# Altium PCB mini-charger.PcbDoc
Units mm, origin at the board's own origin, x right, y up, seen from the top; angles counter-clockwise.
Board outline 152.4 x 101.6 mm, 2 copper layers (Top Layer, Bottom Layer); 91 components, 62 nets, 263 pads, 20 vias.
Unrouted connection lines stored in the file: 186.
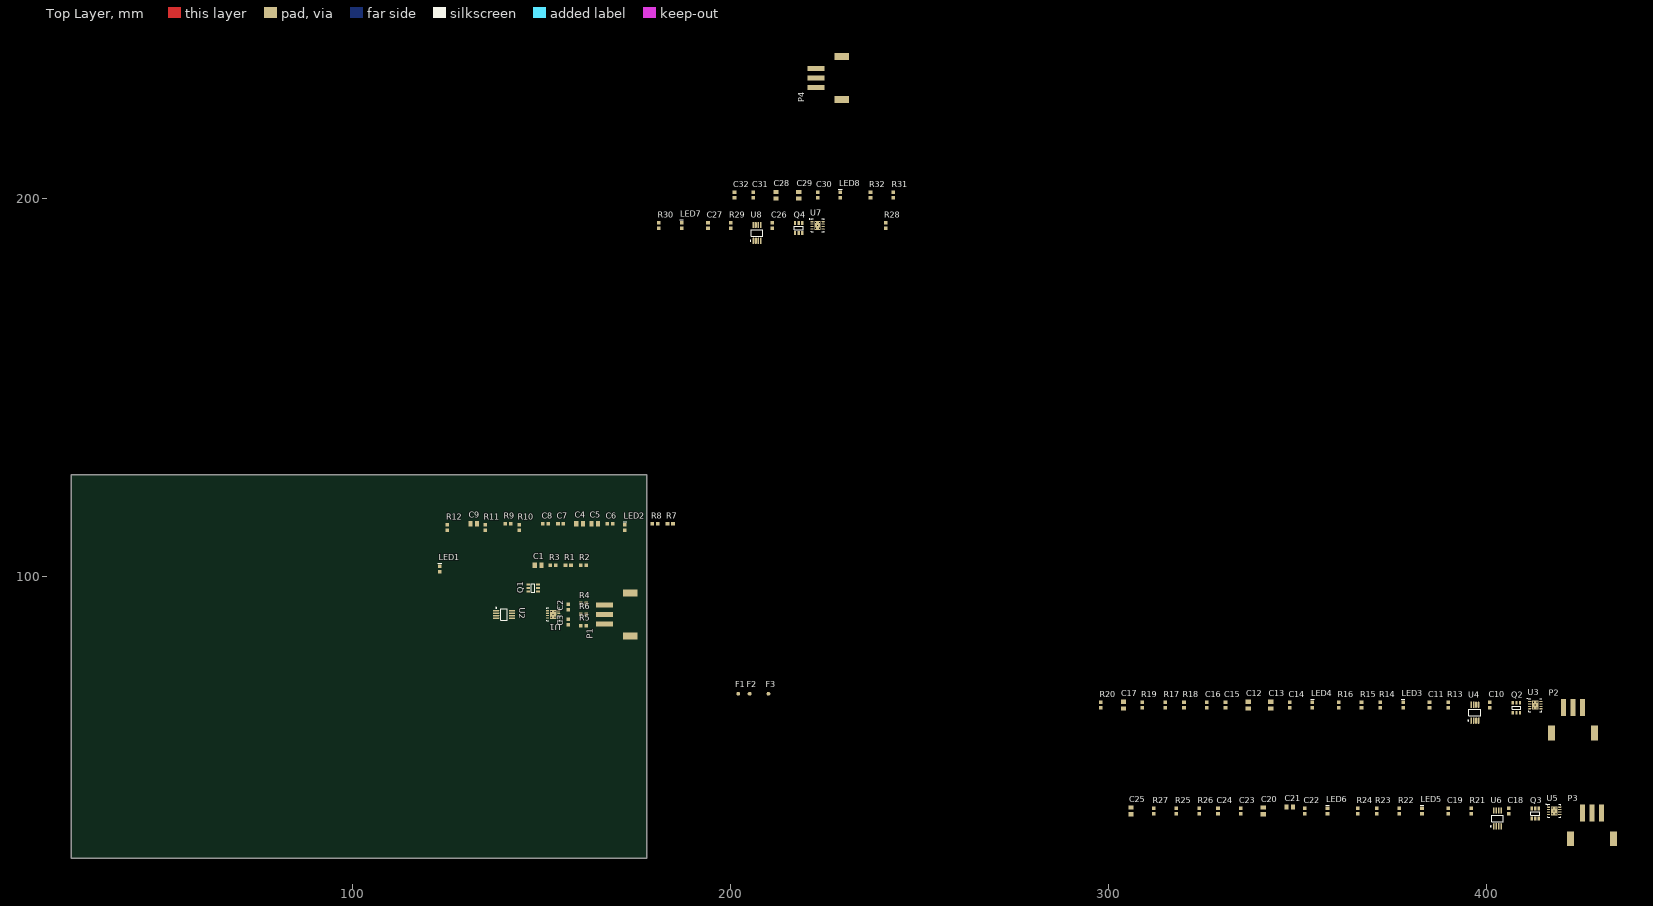
[diagram p0: Top Layer view]
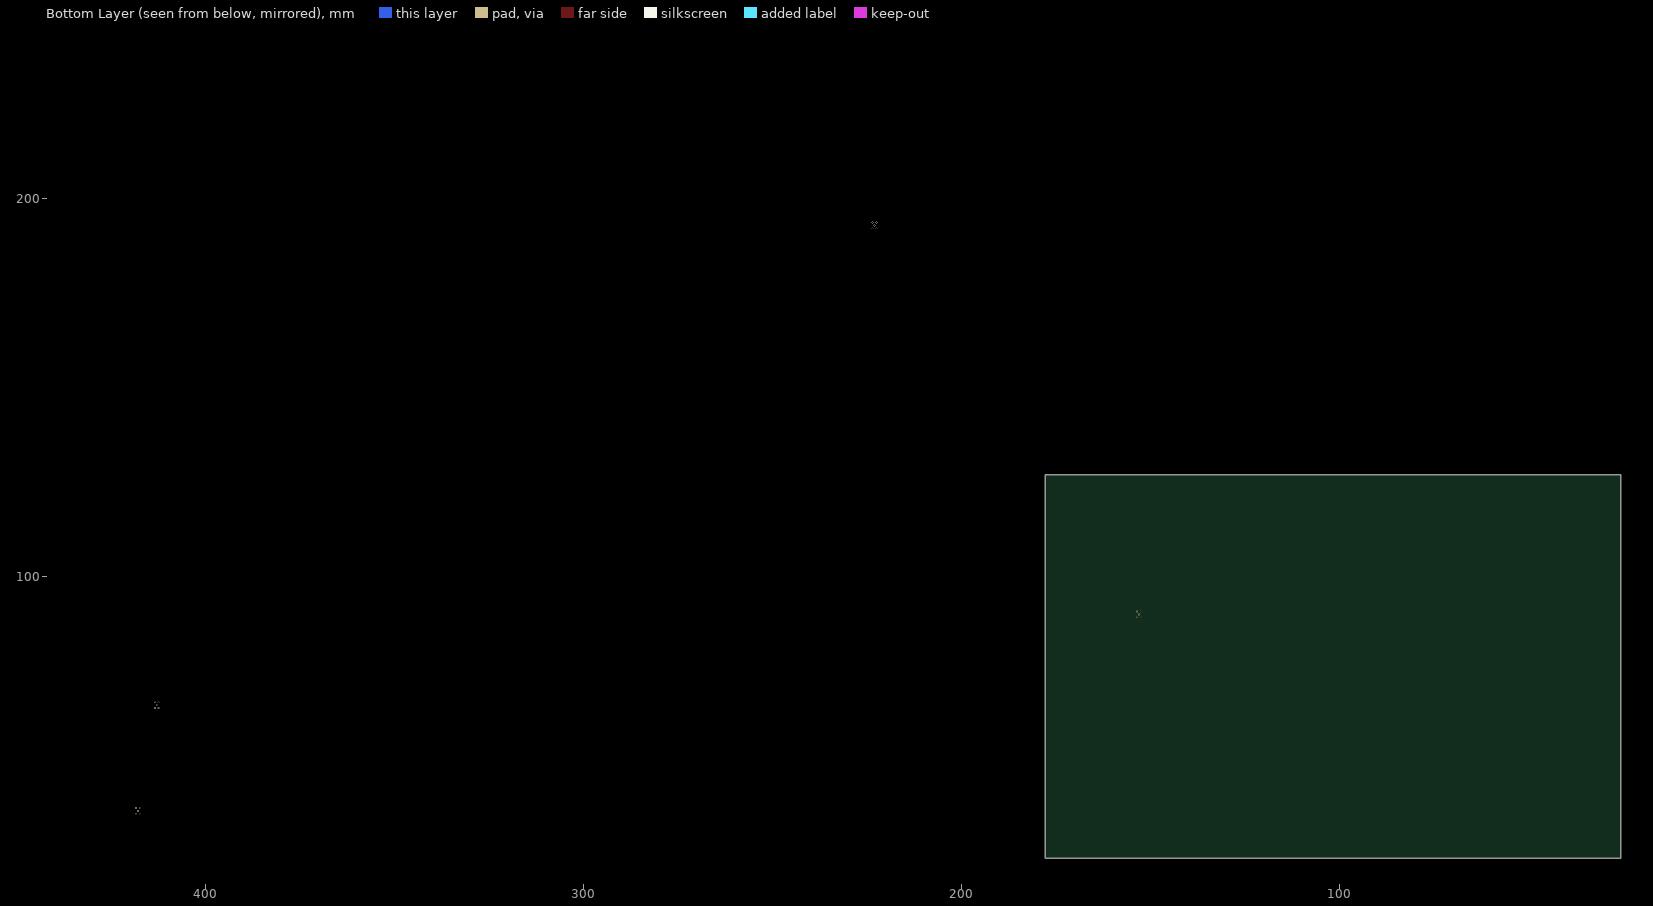
[diagram p1: Bottom Layer view, seen from below]

## Layer stack, top to bottom
Top Solder: solder mask 0.0102, Solder Resist, Dk 3.5
Top Layer: signal copper 0.0356
Dielectric 1: dielectric 0.32, FR-4, Dk 4.8
Bottom Layer: signal copper 0.0356
Bottom Solder: solder mask 0.0102, Solder Resist, Dk 3.5

## Board outline
25.4,25.4 177.8,25.4 177.8,127 25.4,127

## Design rules (kind name [scope] priority, off if disabled: settings)
Clearance [All] p1: gap=0.254
PolygonConnect [All] p1: connectstyle=Relief reliefconductorwidth=0.254 reliefentries=4 polygonreliefangle="90 Angle" airgapwidth=0.254
RoutingVias [All] p1: holewidth=0.711 width=1.27 viastyle="Through Hole" minholewidth=0.711 minwidth=1.27 maxholewidth=0.711 maxwidth=1.27
SolderMaskExpansion [All] p1: expansion=0.102
Width [All] p1: maxlimit=0.254 minlimit=0.254 preferedwidth=0.254
30 further rules are at their usual default settings.

## Components (designator, comment, footprint, x,y, rotation, side; value= is the part's Value field where it differs from the comment)
C1 "CAP" CAP0805 149,103 r0 top
C2 "CAP" CAP0603 157,92 r90 top
C3 "CAP" CAP0603 157,88 r90 top
C4 "CAP" CAP0805 160,114 r0 top
C5 "CAP" CAP0805 164,114 r0 top
C6 "CAP" CAP0603 168,114 r0 top
C7 "CAP" CAP0603 155,114 r0 top
C8 "CAP" CAP0603 151,114 r0 top
C9 "CAP" CAP0805 132,114 r0 top
C10 "CAP" CAP0603 401,66 r90 top
C11 "CAP" CAP0603 385,66 r90 top
C12 "CAP" CAP0805 337,66 r90 top
C13 "CAP" CAP0805 343,66 r90 top
C14 "CAP" CAP0603 348,66 r90 top
C15 "CAP" CAP0603 331,66 r90 top
C16 "CAP" CAP0603 326,66 r90 top
C17 "CAP" CAP0805 304,66 r90 top
C18 "CAP" CAP0603 406,38 r90 top
C19 "CAP" CAP0603 390,38 r90 top
C20 "CAP" CAP0805 341,38 r90 top
C21 "CAP" CAP0805 348,39 r0 top
C22 "CAP" CAP0603 352,38 r90 top
C23 "CAP" CAP0603 335,38 r90 top
C24 "CAP" CAP0603 329,38 r90 top
C25 "CAP" CAP0805 306,38 r90 top
C26 "CAP" CAP0603 211,193 r90 top
C27 "CAP" CAP0603 194,193 r90 top
C28 "CAP" CAP0805 212,201 r90 top
C29 "CAP" CAP0805 218,201 r90 top
C30 "CAP" CAP0603 223,201 r90 top
C31 "CAP" CAP0603 206,201 r90 top
C32 "CAP" CAP0603 201,201 r90 top
F1 "FIDUCIAL" FIDUCIAL-1MM 202,69 r0 top
F2 "FIDUCIAL" FIDUCIAL-1MM 205,69 r0 top
F3 "FIDUCIAL" FIDUCIAL-1MM 210,69 r0 top
LED1 "LED" LED0603P 123,102 r90 top
LED2 "LED" LED0603P 172,113 r90 top
LED3 "LED" LED0603P 378,66 r90 top
LED4 "LED" LED0603P 354,66 r90 top
LED5 "LED" LED0603P 383,38 r90 top
LED6 "LED" LED0603P 358,38 r90 top
LED7 "LED" LED0603P 187,193 r90 top
LED8 "LED" LED0603P 229,201 r90 top
P1 "HEADER-3POS" S3B-XH-SM4-TB 170,90 r90 top
P2 "HEADER-3POS" S3B-XH-SM4-TB 423,62 r0 top
P3 "HEADER-3POS" S3B-XH-SM4-TB 428,34 r0 top
P4 "HEADER-3POS" S3B-XH-SM4-TB 226,232 r90 top
Q1 "STT3P2UH7" SOT23-6 149,97 r90 top
Q2 "STT3P2UH7" SOT23-6 408,64 r0 top
Q3 "STT3P2UH7" SOT23-6 413,36 r0 top
Q4 "STT3P2UH7" SOT23-6 218,191 r0 top
R1 "RES" RES0603 157,103 r0 top
R2 "RES" RES0603 161,103 r0 top
R3 "RES" RES0603 153,103 r0 top
R4 "RES" RES0603 161,93 r0 top
R5 "RES" RES0603 161,87 r0 top
R6 "RES" RES0603 161,90 r0 top
R7 "RES" RES0603 184,114 r0 top
R8 "RES" RES0603 180,114 r0 top
R9 "RES" RES0603 141,114 r0 top
R10 "RES" RES0603 144,113 r90 top
R11 "RES" RES0603 135,113 r90 top
R12 "RES" RES0603 125,113 r90 top
R13 "RES" RES0603 390,66 r90 top
R14 "RES" RES0603 372,66 r90 top
R15 "RES" RES0603 367,66 r90 top
R16 "RES" RES0603 361,66 r90 top
R17 "RES" RES0603 315,66 r90 top
R18 "RES" RES0603 320,66 r90 top
R19 "RES" RES0603 309,66 r90 top
R20 "RES" RES0603 298,66 r90 top
R21 "RES" RES0603 396,38 r90 top
R22 "RES" RES0603 377,38 r90 top
R23 "RES" RES0603 371,38 r90 top
R24 "RES" RES0603 366,38 r90 top
R25 "RES" RES0603 318,38 r90 top
R26 "RES" RES0603 324,38 r90 top
R27 "RES" RES0603 312,38 r90 top
R28 "RES" RES0603 241,193 r90 top
R29 "RES" RES0603 200,193 r90 top
R30 "RES" RES0603 181,193 r90 top
R31 "RES" RES0603 243,201 r90 top
R32 "RES" RES0603 237,201 r90 top
U1 "BQ29209DRBR" DRB8-2400X1650TP 153,90 r180 top
U2 "MCP73844-840I/MS" MSOP-MS8_N 140,90 r0 top
U3 "BQ29209DRBR" DRB8-2400X1650TP 413,66 r0 top
U4 "MCP73844-840I/MS" MSOP-MS8_N 397,64 r90 top
U5 "BQ29209DRBR" DRB8-2400X1650TP 418,38 r0 top
U6 "MCP73844-840I/MS" MSOP-MS8_N 403,36 r90 top
U7 "BQ29209DRBR" DRB8-2400X1650TP 223,193 r0 top
U8 "MCP73844-840I/MS" MSOP-MS8_N 207,191 r90 top

## Footprints (in the part's own frame and the unit in brackets; to place one, negate y for a bottom-side part, rotate by r counter-clockwise, add the part's x,y. Pads: shape width x height; smd on the part's side, far side on the other; paste and mask are expansions set on the pad)
CAP0603 [mm]
  rect 0.95x0.95 smd: 1(-0.725,0) 2(0.725,0)
  body extent -0.8,-0.41 0.8,0.41, height 0.57
CAP0805 [mm]
  rect 1.1x1.4 smd: 1(0.875,0) 2(-0.875,0)
  body extent -1,-0.63 1,0.64, height 0.57
DRB8-2400X1650TP [mm] "SON, 8-Leads, Body 3x3mm, Pitch 0.65mm, Thermal Pad 2.4x1.65mm, TI Recommended"
  oval 0.85x0.3 smd paste-0.025 mask+0.07: 1(-1.475,0.975) 2(-1.475,0.325) 3(-1.475,-0.325) 4(-1.475,-0.975) 5(1.475,-0.975) 6(1.475,-0.325) 7(1.475,0.325) 8(1.475,0.975)
  rect 1.65x2.4 smd paste-0.825 mask+0.07: 9(0,0)
  silkscreen extent -2.17,-1.73 1.73,1.77, body extent -1.57,-1.57 1.58,1.58, height 1
FIDUCIAL-1MM [mm] "1MM FIDUCAL MARKER"
  round 1 smd paste+0 mask+0.5: 1(0,0)
LED0603P [mm]
  rect 0.95x0.95 smd: 1(-0.725,0) 2(0.725,0)
  silkscreen extent 1.5,-0.5 1.5,0.5, body extent -0.8,-0.4 0.81,0.4, height 0.72
MSOP-MS8_N [mm] "TSOP, 8-Leads, Body 3x3mm, Pitch 0.65mm, IPC Medium Density"
  oval 1.7x0.45 smd: 1(-2.1,0.975) 2(-2.1,0.325) 3(-2.1,-0.325) 4(-2.1,-0.975) 5(2.1,-0.975) 6(2.1,-0.325) 7(2.1,0.325) 8(2.1,0.975)
  silkscreen extent -2.22,-1.55 0.85,1.87, body extent -1.55,-1.55 1.55,1.55, height 1.1
RES0603 [mm]
  rect 0.95x0.95 smd: 1(-0.725,0) 2(0.725,0)
  body extent -0.8,-0.4 0.8,0.4, height 0.3
S3B-XH-SM4-TB [mm] "JST XH 3POS"
  rect 1.8x3.9 smd: 0(-5.7,-3.4) 0(5.7,-3.4)
  rect 1.3x4.5 smd: 1(-2.5,3.4) 2(0,3.4) 3(2.5,3.4)
  body extent -6.22,-5.25 6.23,4.75, height 6
SOT23-6 [mm] "SOT143-4 as used in SP0503BAHTG"
  round 0.2 on Top Overlay: 1(-1.5,0.75)
  rect 0.6x1 smd: 1(-0.95,0) 2(0,0) 3(0.95,0) 4(-0.95,2.6) 5(0,2.6) 6(0.95,2.6)
  silkscreen extent -1.15,0.85 1.15,1.75, body extent -1.46,0.13 1.46,2.47, height 1

## Part data
C1 C4 C5 C9 C12 C13 C17 C20 C21 C25 C28 C29: library part CAP-SM-0805-X5R-10uF, "CAP SM 0805 X5R 10uF"
C2 C3 C6 C7 C8 C10 C11 C14 C15 C16 C18 C19 C22 C23 C24 C26 C27 C30 C31 C32: library part CAP-SM-0603-X7R-100nF, "CAP SM 0603 X7R 100nF"
F1 F2 F3: library part FIDUCIAL-1MM, "FIDUCIAL 1MM CENTER"
LED1 LED2 LED3 LED4 LED5 LED6 LED7 LED8: library part LED-0603-RED, "LED 0603 RED"
P1 P2 P3 P4: library part S3B-XH-SM4-TB, "CONN HEADER XH SMD 3POS 2.5MM"
Q1 Q2 Q3 Q4: "*"
R1 R9 R17 R25: library part RES-SM-0603-1R, "RES SM 0603 1R"
R2 R10 R18 R26: library part RES-SM-0603-27R, "RES SM 0603 27R"
R3 R11 R19 R27: library part RES-SM-0603-100R, "RES SM 0603 100R"
R4 R12 R20 R28: library part RES-SM-0603-30R, "RES SM 0603 30R"
R5 R13 R21 R29: library part RES-SM-0603-130R, "RES SM 0603 130R"
R6 R14 R22 R30: library part RES-SM-0603-51R, "RES SM 0603 51R"
R7 R15 R23 R31: library part RES-SM-0603-220R, "RES SM 0603 220R"
R8 R16 R24 R32: library part RES-SM-0603-100K, "RES SM 0603 100K"
U1 U3 U5 U7: "Voltage Protection with Automatic Cell Balance for 2-Cell Li-Ion Batteries, OVP=4.3 V, -40 to 85 degC, 8-pin SON (DRB), Green (RoHS & no Sb/Br)"
U2 U4 U6 U8: "Dual Series cell Li-Ion/Li-Polymer Charge Management Controller, 8.4V, 8-Pin MSOP, Industrial Temperature"

## Via types
v1: diameter 0.5, hole 0.2, Top Layer to Bottom Layer, 20 vias

## Nets (pads, with @x,y where several pads share a name; then routed paths per layer and width w, separated by ;. In a path a pad name is that pad's centre, name@x,y a point inside that pad or via, vN(x,y) a via of type N, cw(c..) or ccw(c..) an arc to the next point about the centre after c; other vN are vias at no path point)
GND: C1.1 C3.1 C4.1 C5.1 C6.1 C7.1 C8.1 C9.1 C11.1 C12.1 C13.1 C14.1 C15.1 C16.1 C17.1 C19.1 C20.1 C21.1 C22.1 C23.1 C24.1 C25.1 C27.1 C28.1 C29.1 C30.1 C31.1 C32.1 LED2.2 LED4.2 LED6.2 LED8.2 P1.1 P2.1 P3.1 P4.1 U1.5 U1.6 U1.9 U2.6 U3.5 U3.6 U3.9 U4.6 U5.5 U5.6 U5.9 U6.6 U7.5 U7.6 U7.9 U8.6
  other v1: 417.5,37.25 418.5,37.25 418,38 417.5,38.75 418.5,38.75 412.5,65.25 413.5,65.25 413,66 412.5,66.75 413.5,66.75 152.5,89.25 153.5,89.25 153,90 152.5,90.75 153.5,90.75 222.5,192.25 223.5,192.25 223,193 222.5,193.75 223.5,193.75
NetC1_2: C1.2 Q1.4 R2.2 U2.1
NetC2_1: C2.1 C3.2 R5.1 U1.2
NetC2_2: C2.2 R4.1 U1.1
NetC5_2: C5.2 P1.3 Q1.1@149,96.05 Q1.2 Q1.5 Q1.6 R3.2 R4.2 U2.7
NetC6_2: C6.2 U1.4
NetC7_2: C7.2 R3.1 U1.7
NetC8_2: C8.2 U2.5
NetC9_2: C9.2 Q2.4 R10.2 U4.1
NetC10_1: C10.1 C11.2 R13.1 U3.2
NetC10_2: C10.2 R12.1 U3.1
NetC13_2: C13.2 P2.3 Q2.1@407.05,64 Q2.2 Q2.5 Q2.6 R11.2 R12.2 U4.7
NetC14_2: C14.2 U3.4
NetC15_2: C15.2 R11.1 U3.7
NetC16_2: C16.2 U4.5
NetC17_2: C17.2 Q3.4 R18.2 U6.1
NetC18_1: C18.1 C19.2 R21.1 U5.2
NetC18_2: C18.2 R20.1 U5.1
NetC21_2: C21.2 P3.3 Q3.1@412.05,36 Q3.2 Q3.5 Q3.6 R19.2 R20.2 U6.7
NetC22_2: C22.2 U5.4
NetC23_2: C23.2 R19.1 U5.7
NetC24_2: C24.2 U6.5
NetC25_2: C25.2 Q4.4 R26.2 U8.1
NetC26_1: C26.1 C27.2 R29.1 U7.2
NetC26_2: C26.2 R28.1 U7.1
NetC29_2: C29.2 P4.3 Q4.1@217.05,191 Q4.2 Q4.5 Q4.6 R27.2 R28.2 U8.7
NetC30_2: C30.2 U7.4
NetC31_2: C31.2 R27.1 U7.7
NetC32_2: C32.2 U8.5
NetLED1_2: LED1.2 U2.3
NetLED2_1: LED2.1 R7.1
NetLED3_2: LED3.2 U4.3
NetLED4_1: LED4.1 R15.1
NetLED5_2: LED5.2 U6.3
NetLED6_1: LED6.1 R23.1
NetLED7_2: LED7.2 U8.3
NetLED8_1: LED8.1 R31.1
NetP1_2: P1.2 R5.2 R6.2
NetP2_2: P2.2 R13.2 R14.2
NetP3_2: P3.2 R21.2 R22.2
NetP4_2: P4.2 R29.2 R30.2
NetQ1_3: Q1.3 U2.8
NetQ2_3: Q2.3 U4.8
NetQ3_3: Q3.3 U6.8
NetQ4_3: Q4.3 U8.8
NetR1_2: R1.2 R2.1
NetR6_1: R6.1 U1.3
NetR7_2: R7.2 U1.8
NetR8_2: R8.2 U2.4
NetR9_2: R9.2 R10.1
NetR14_1: R14.1 U3.3
NetR15_2: R15.2 U3.8
NetR16_2: R16.2 U4.4
NetR17_2: R17.2 R18.1
NetR22_1: R22.1 U5.3
NetR23_2: R23.2 U5.8
NetR24_2: R24.2 U6.4
NetR25_2: R25.2 R26.1
NetR30_1: R30.1 U7.3
NetR31_2: R31.2 U7.8
NetR32_2: R32.2 U8.4
VIN: C4.2 C12.2 C20.2 C28.2 LED1.1 LED3.1 LED5.1 LED7.1 R1.1 R8.1 R9.1 R16.1 R17.1 R24.1 R25.1 R32.1 U2.2 U4.2 U6.2 U8.2
pads on no net: F1.1 F2.1 F3.1 P1.0 P2.0 P3.0 P4.0 Q1.1@148.25,95.5 Q2.1@406.5,64.75 Q3.1@411.5,36.75 Q4.1@216.5,191.75